# EAGLE board Grove  - XBee Carrier v1.0 (EAGLE 9.4.2)
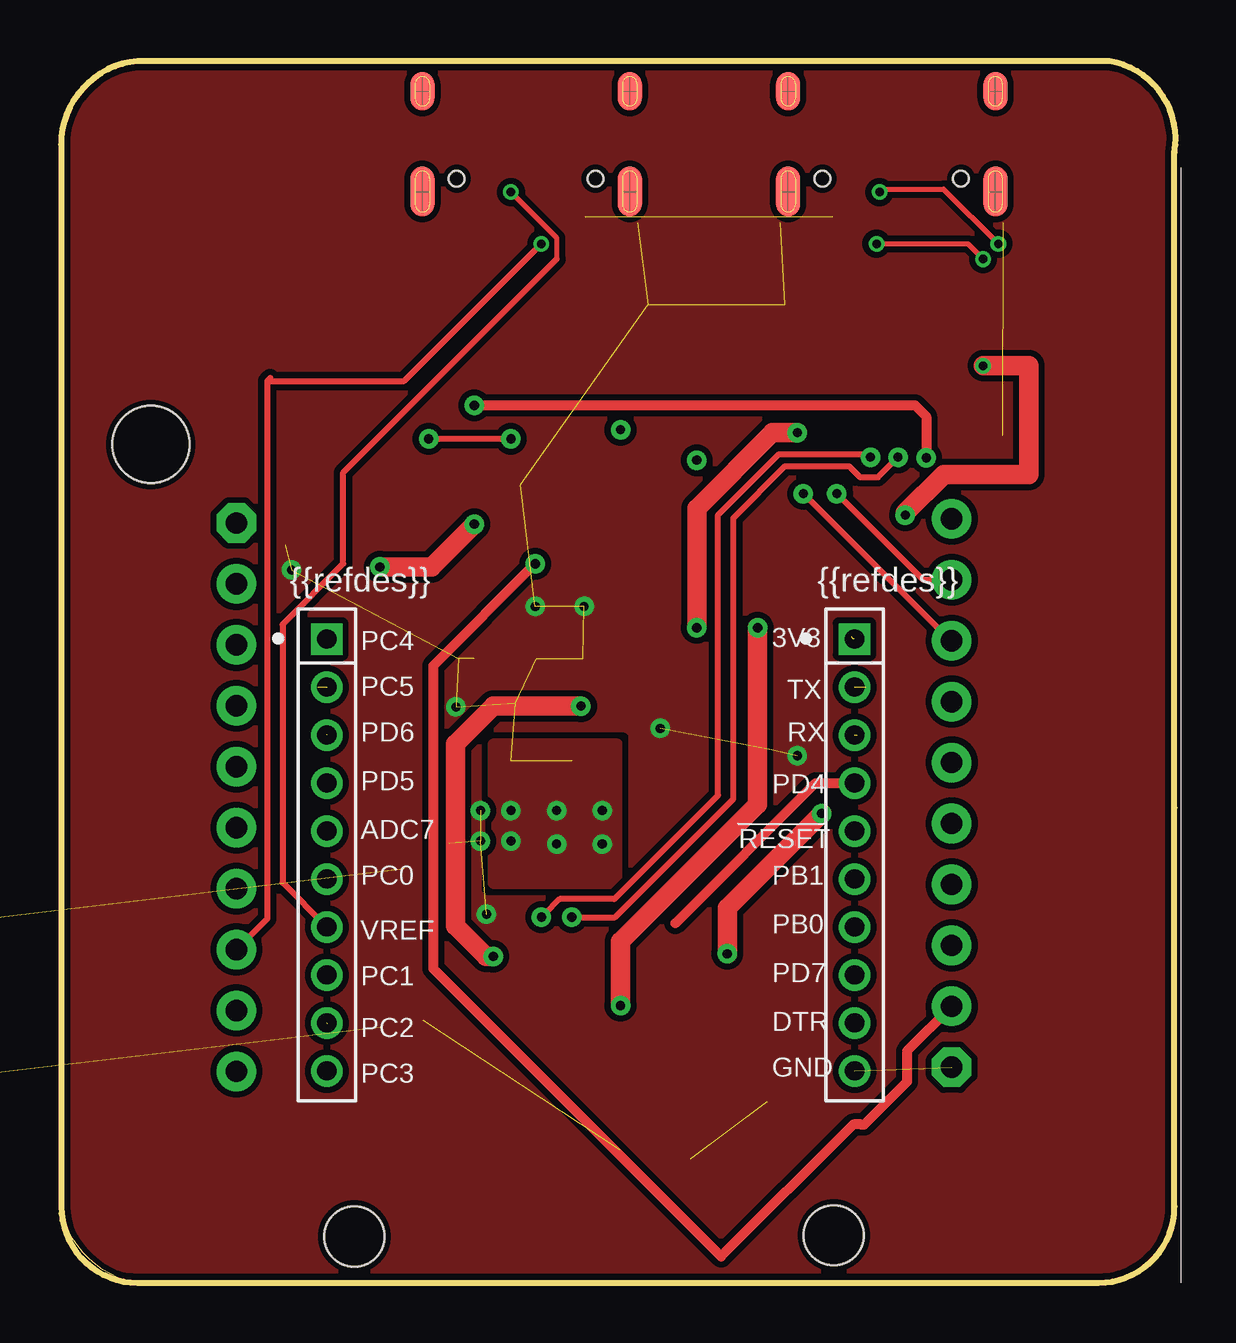
[diagram p0: board, top side]
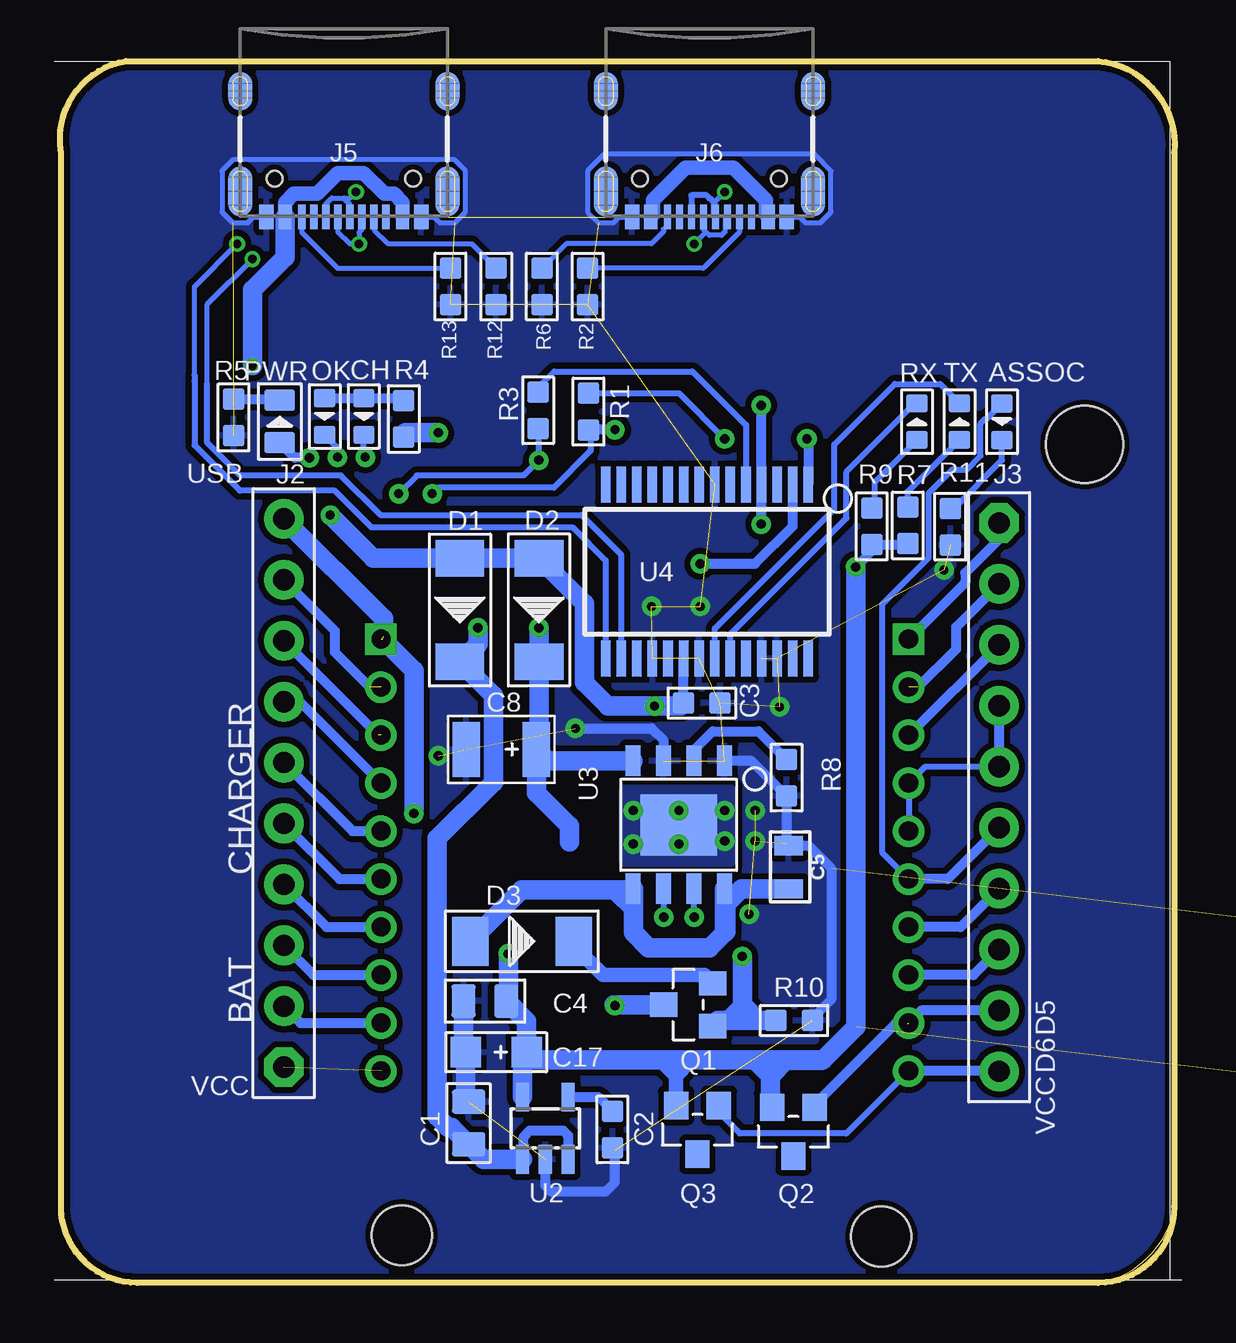
[diagram p1: board, bottom side, seen from below]

Size 46.5 x 50.93 mm. Coordinates in mm from the lower left corner, seen from the top.
Outline: 46.46,19.81 46.46,3.17 arc-90 43.28,0 3.23,0 arc-90 0.06,3.17 0.06,47.12 arc-90 3.23,50.93 43.75,50.93 arc-90 46.46,47.12 46.46,19.81
Outline: 0,47.85 arc-67 2.69,50.93
Outline: 46.48,3.17 arc-67 43.79,0
Outline: 3.1,0 arc-67 0.03,3.17
Outline: 46.46,19.81 46.38,23.27
Copper layers (1*16): Top 0.035mm / dielectric 1.5mm / Bottom 0.035mm
Design rules "SeeedStudio_rule_no_angle_090911 *": minimum track width 6mil, minimum drill 12mil, track to track 6mil, track to pad 6mil, pad to pad 6mil, via to via 6mil, smd to smd 0mil, copper to edge 10mil, drill to drill 10mil, minimum pad ring 10mil, minimum via ring 6mil, stop-mask expansion 2mil, vias tented up to drill 100mil, thermal gap 10mil
Net classes: 0 default: width 0.203 mm, drill 0.305 mm, clearance 0.127 mm
Holes 3.2 mm at 3.79,34.95
Holes 2.5 mm at 32.26,1.98 12.27,1.93

## Footprints (pad centres in the part's own frame; a part is rotated, then mirrored left to right if it is on the bottom)
D0603 = smd 0.762 x 0.889: + -0.762,0; - 0.762,0
0805 = smd 1.016 x 1.397: 1 -0.889,0; 2 0.889,0
0603 = smd 0.889 x 0.889: 1 -0.762,0; 2 0.762,0
0805' = smd 0.8 x 1.2: 1 -0.9,0; 2 0.9,0
AVX-B = smd 1.143 x 2.286: + -1.46,0; - 1.46,0
AVX-A = smd 1.27 x 1.27: + -1.27,0; - 1.27,0
D2010 = smd 1.524 x 2.032: + -2.159,0; - 2.159,0
SULLINS_NPPN101BFCN-RC_0 = drill 0.8 pad 1.3 square: 1 0,9 | drill 0.8 pad 1.3: 2 0,7; 3 0,5; 4 0,3; 5 0,1; 6 0,-1; 7 0,-3; 8 0,-5; 9 0,-7; 10 0,-9
2.54_10P = drill 0.889 pad 1.651 octagon: 1 0,11.43 | drill 0.889 pad 1.651: 2 0,8.89; 3 0,6.35; 4 0,3.81; 5 0,1.27; 6 0,-1.27; 7 0,-3.81; 8 0,-6.35; 9 0,-8.89; 10 0,-11.43
USB-C-16P = smd 0.3 x 1.016: A5 -1.25,0.154; A6 -0.25,0.154; A7 0.25,0.154; A8 1.25,0.154; B5 1.75,0.154; B6 0.75,0.154; B7 -0.75,0.154; B8 -1.75,0.154 | smd 0.6 x 1.016: GND -3.225,0.154; GND2 3.225,0.154 | smd 1 x 2.1: SHLD1 -4.32,-0.915; SHLD2 4.32,-0.915 | smd 1 x 2.1 bottom: SHLD3 -4.32,-0.915; SHLD4 4.32,-0.915 | smd 1 x 1.6: SHLD5 -4.32,-5.095; SHLD8 4.32,-5.095 | smd 1 x 1.6 bottom: SHLD6 -4.32,-5.095; SHLD7 4.32,-5.095 | smd 0.55 x 1.016: VBUS1 -2.45,0.154; VBUS2 2.45,0.154 | hole 0.65: -2.89,-1.445; 2.89,-1.445
D0805 = smd 0.889 x 1.27: + -0.889,0; - 0.889,0
SOT23 = smd 1.016 x 1.143: 1 -0.889,-1.016; 2 0.889,-1.016; 3 0,1.016
QFP80P900X900X145-32N = smd 1.473 x 0.508: 1 -4.216,2.794; 2 -4.216,2.007; 3 -4.216,1.194; 4 -4.216,0.406; 5 -4.216,-0.406; 6 -4.216,-1.194; 7 -4.216,-2.007; 8 -4.216,-2.794; 17 4.216,-2.794; 18 4.216,-2.007; 19 4.216,-1.194; 20 4.216,-0.406; 21 4.216,0.406; 22 4.216,1.194; 23 4.216,2.007; 24 4.216,2.794 | smd 0.508 x 1.473: 9 -2.794,-4.216; 10 -2.007,-4.216; 11 -1.194,-4.216; 12 -0.406,-4.216; 13 0.406,-4.216; 14 1.194,-4.216; 15 2.007,-4.216; 16 2.794,-4.216; 25 2.794,4.216; 26 2.007,4.216; 27 1.194,4.216; 28 0.406,4.216; 29 -0.406,4.216; 30 -1.194,4.216; 31 -2.007,4.216; 32 -2.794,4.216
SOT23-5 = smd 0.55 x 1.2: 1 -0.95,-1.3; 2 0,-1.3; 3 0.95,-1.3; 4 0.95,1.3; 5 -0.95,1.3
SOP8 = smd 0.635 x 1.27: 1 -1.905,-2.667; 2 -0.635,-2.667; 3 0.635,-2.667; 4 1.905,-2.667; 5 1.905,2.667; 6 0.635,2.667; 7 -0.635,2.667; 8 -1.905,2.667 | smd 3.175 x 2.54: HEAT 0,0
SSOP28 = smd 0.4 x 1.5: 1 -4.225,-3.625; 2 -3.575,-3.625; 3 -2.925,-3.625; 4 -2.275,-3.625; 5 -1.625,-3.625; 6 -0.975,-3.625; 7 -0.325,-3.625; 8 0.325,-3.625; 9 0.975,-3.625; 10 1.625,-3.625; 11 2.275,-3.625; 12 2.925,-3.625; 13 3.575,-3.625; 14 4.225,-3.625; 15 4.225,3.625; 16 3.575,3.625; 17 2.925,3.625; 18 2.275,3.625; 19 1.625,3.625; 20 0.975,3.625; 21 0.325,3.625; 22 -0.325,3.625; 23 -0.975,3.625; 24 -1.625,3.625; 25 -2.275,3.625; 26 -2.925,3.625; 27 -3.575,3.625; 28 -4.225,3.625

## Placement (x,y rotation side)
ASSOC  Green  [D0603]  7.24,35.89 270 bottom
C1  10uF  [0805]  29.47,6.66 90 bottom
C2  100nF  [0603]  23.47,6.39 270 bottom
C3  100nF  [0603]  19.75,24.16 180 bottom
C4  10uF  [0805]  28.79,11.75 180 bottom
C5  1.0uF  [0805']  16.13,17.32 270 bottom
C8  10V-22uF  [AVX-B]  28.11,22.24 180 bottom
C17  15v-10uF  [AVX-A]  28.32,9.61 180 bottom
CH  RED  [D0603]  33.84,36.11 270 bottom
D1  SS14  [D2010]  29.83,28.04 270 bottom
D2  SS14  [D2010]  26.54,28.05 270 bottom
D3  SS14  [D2010]  27.25,14.23 0 bottom
J1  SULLINS_NPPN101BFCN-RCSULLINS_NPPN101BFCN-RC_0_0  [SULLINS_NPPN101BFCN-RC_0]  11.13,17.83 0 top
J2  HEADER-10P_STANDARD  [2.54_10P]  37.17,20.42 180 bottom
J3  HEADER-10P_STANDARD  [2.54_10P]  7.36,20.24 0 bottom
J4  SULLINS_NPPN101BFCN-RCSULLINS_NPPN101BFCN-RC_0_0  [SULLINS_NPPN101BFCN-RC_0]  33.12,17.83 0 top
J5  [USB-C-16P]  34.67,44.58 180 bottom
J6  [USB-C-16P]  19.43,44.58 180 bottom
OK  Green  [D0603]  35.47,36.11 270 bottom
PWR  red  [D0805]  37.34,35.9 90 bottom
Q1  Si2305DS  [SOT23]  20.32,11.59 90 bottom
Q2  Si2305DS  [SOT23]  15.93,6.3 180 bottom
Q3  Si2305DS  [SOT23]  19.93,6.38 180 bottom
R1  1K  [0603]  24.48,36.32 270 bottom
R2  [0603]  24.51,41.53 90 bottom
R3  1K  [0603]  26.57,36.37 270 bottom
R4  1k  [0603]  32.18,36.01 270 bottom
R5  1K  [0603]  39.27,36.08 90 bottom
R6  [0603]  26.42,41.53 90 bottom
R7  1K  [0603]  11.16,31.57 270 bottom
R8  3.9K  [0603]  16.22,21.06 90 bottom
R9  1K  [0603]  12.66,31.53 270 bottom
R10  10K  [0603]  15.91,10.94 180 bottom
R11  1K  [0603]  9.39,31.52 90 bottom
R12  [0603]  28.32,41.53 90 bottom
R13  [0603]  30.23,41.53 90 bottom
RX  red  [D0603]  10.78,35.89 90 bottom
TX  red  [D0603]  9.01,35.9 90 bottom
U1  TUSB2046BVF  [QFP80P900X900X145-32N]  -9.14,10.29 0 top  (outside the outline)
U2  RT9167A_33PB  [SOT23-5]  26.27,6.44 0 bottom
U3  CN3083  [SOP8]  20.71,19.09 180 bottom
U4  FT232RL  [SSOP28]  19.53,29.64 180 bottom

## Library data of the parts
ASSOC C1-C4 C8 C17 CH D1-D3 OK PWR Q1-Q3 R1-R13 RX TX = discrete
C5 = SparkFun-Capacitors; PROD_ID: CAP-08064
J1 J4 = Sullins - NPPN101BFCN-RC; CENTROID_NOT_SPECIFIED: No; CONNECTOR_TYPE: Female; DATASHEET: http://www.sullinscorp.com/drawings/75_1BFC_10483.pdf; DIGIKEY_DESCRIPTION: CONN RECEPT 2MM SINGLE STR 10POS; DIGIKEY_PART_NUMBER: S5751-10-ND; IS_FEMALE: yes; LEAD_FREE: yes; MF: Sullins; MPN: NPPN101BFCN-RC; NUMBER_OF_PINS: 10; NUM_PINS: 10; PACKAGE: CONN_PTH_RCT10; PIN_PITCH: 2 mm; PREFIX: J; ROHS: yes; ROWS: 1; TEMPERATURE_RANGE_HIGH: +105°C; TEMPERATURE_RANGE_LOW: -40°C
J2 J3 = Connector
J5 J6 = SparkFun-Connectors; PROD_ID: CONN-14122
U1 = TUSB2046BVF; AVAILABILITY: Unavailable; DESCRIPTION: 4-Port Full-Speed Universal Serial Bus Hub 32-LQFP 0 to 70; MF: Texas Instruments; MP: TUSB2046BVF; PACKAGE: LQFP-32 Texas Instruments; PRICE: None
U2-U4 = IC

## Nets
ASSOC: ASSOC.+ J1.6 J3.6
D4: J2.7 J4.4
D5: J1.4 J1.5 J3.4 J3.5
D6: J1.3 J3.3
D7: J2.3 J4.8
D8: J2.4 J4.7
D9: J2.5 J4.6
D+: J5.A6 J5.B6 U4.15
D-: J5.A7 J5.B7 U4.16
D_2+: J1.7 J3.7 J6.A6 J6.B6
D_2-: J1.8 J3.8 J6.A7 J6.B7
DTR: J2.2 J4.9 U4.2
GND: C1.2 C2.2 C3.1 C4.2 C5.1 C8.- C17.- J5.GND J5.GND2 J6.GND J6.GND2 R2.1 R5.1 R6.1 R8.1 R10.1 R11.1 R12.1 R13.1 U1.7 U1.28 U1.31 U2.2 U3.1 U3.3 U4.7 U4.18 U4.21 U4.25 U4.26
HEAT: U3.HEAT
N$1: PWR.- R5.2
N$2: R8.2 U3.2
N$4: J6.A5 R2.2
N$5: J5.A5 R12.2
N$6: C2.1 U2.4
N$7: CH.- U3.7
N$8: OK.- U3.6
N$9: CH.+ OK.+ R4.1
N$11: D3.- Q1.2
N$12: ASSOC.- R11.2
N$13: J6.B5 R6.2
N$14: J5.B5 R13.2
N$15: R9.1 RX.+
N$16: R7.1 TX.+
N$17: J2.1 J4.10
PWR_CTR1: J1.10 J3.10 Q3.1
PWR_CTR2: J1.9 J3.9 Q2.1
RESET: J2.6 J4.5
RX: J2.8 J4.3 R1.2
RX_LED: RX.- U4.23
RXD: R3.1 U4.5
SCL: J1.2 J3.2
SDA: J1.1 J3.1
TX: J2.9 J4.2 R3.2
TX_LED: TX.- U4.22
TXD: R1.1 U4.1
USB_5V: C3.2 D1.+ D2.+ J5.VBUS1 J5.VBUS2 J6.VBUS1 J6.VBUS2 Q1.1 R10.2 U4.20
VBET: C5.2 D3.+ U3.5 U3.8
VBET_OUT: C1.1 D1.- Q1.3 U2.1 U2.3
VCC: U1.3
VCC_2: U1.25
VCC_3V3: C4.1 C17.+ J2.10 J4.1 PWR.+ Q2.2 Q3.2 R7.2 R9.2 U1.8 U2.5 U4.4
VCC_OUT1: Q3.3
VCC_OUT2: Q2.3
VIN: C8.+ D2.- R4.2 U3.4

## Tracks (layer width: path | path; a pad name or v marks a point on that pad's centre or on a via)
ASSOC
  Bottom 0.254: ASSOC.+ 7.87,36.02 7.92,36.02 8.13,35.81 8.13,34.48 8.7,33.91 9.29,33.91 10.29,32.92 10.29,30.23 12.24,28.28 12.24,17.94 J1.6 | 9.48,16.85 9.5,16.83
  Bottom 0.406: 9.5,16.83 9.48,16.85 J3.6 | 9.5,16.83 J1.6
D4
  Top 0.254: 31.5,20.83
  Top 0.406: 25.65,14.99 31.5,20.83 | 31.5,20.83 J4.4
  Bottom 0.406: J4.4 36.52,24.23 J2.7
D5
  Bottom 0.254: 10.98,20.97 J1.4 | J3.5 10.44,21.51 J1.4 | J1.4 J1.5
  Bottom 0.406: J3.5 J3.4
D6  (1 unrouted)
  Bottom 0.406: J3.3 J1.3
D7
  Bottom 0.254: J4.8
  Bottom 0.406: J2.3 35.93,12.83 J4.8
D8
  Bottom 0.406: J2.4 35.39,14.83 J4.7
D9
  Bottom 0.406: J2.5 34.85,16.83 J4.6
D+  (via drill 0.35)
  Top 0.203: v39.12,43.31 36.83,45.59 34.29,45.59 v34.16,45.47
  Bottom 0.203: J5.A6 34.42,44.96 34.67,45.21 | J5.B6 35.42,44.97 35.18,45.21 34.67,45.21 | 40.89,37.59 40.89,41.53 v39.12,43.31 | 34.67,45.21 34.42,45.21 v34.16,45.47
  Bottom 0.254: U4.15 23.76,30.11 25.15,31.5 33.53,31.5 35.05,33.02 39,33.02 40.89,34.91 40.89,37.59 40.89,37.85
D-  (via drill 0.35)
  Top 0.203: v34.04,43.31 37.85,43.31 v38.48,42.67
  Bottom 0.203: J5.A7 34.92,43.81 34.42,43.31 v34.04,43.31 34.04,43.79 33.92,43.91 J5.B7 | v38.48,42.67 40.39,40.77 40.39,37.46
  Bottom 0.254: U4.16 23.11,30.35 24.77,32 33.15,32 34.8,33.66 38.99,33.66 40.39,35.05 40.39,37.46
D_2+  (via drill 0.35)
  Top 0.203: v18.8,45.47 20.7,43.56 20.7,42.67
  Top 0.254: J1.7 9.27,16.68 9.27,27.43 11.81,29.97 11.81,33.78 20.7,42.67
  Bottom 0.203: J6.A6 19.18,45.08 v18.8,45.47
  Bottom 0.254: J1.7 | J6.B6 20.18,45.33 19.55,45.33 19.43,45.21 19.41,45.21 19.25,45.05 19.25,44.49 J6.A6
  Bottom 0.406: J3.7 8.96,14.83 J1.7
D_2-  (via drill 0.35)
  Top 0.254: 8.76,37.72 8.64,37.59 | J3.8 8.64,15.17 8.64,37.59 | 8.64,37.59 14.35,37.59 v20.07,43.31
  Bottom 0.203: J6.B7 18.78,44.33 18.78,43.81 18.93,43.66 19.44,43.66 19.57,43.8 | 19.57,43.8 19.68,43.91 J6.A7 | 19.57,43.8 v20.07,43.31
  Bottom 0.406: J3.8 8.42,12.83 J1.8
DTR  (via drill 0.38 pad 0.81)
  Top 0.254: 33.53,6.6 33.4,6.6
  Top 0.406: v19.81,29.97 15.57,25.73 15.57,13.09 27.56,1.1 33.06,6.6 33.4,6.6 | J2.2 35.31,9.66 35.31,8.38 33.53,6.6
  Bottom 0.254: J4.9
  Bottom 0.406: J2.2 36.47,10.83 J4.9 | v19.81,29.97 17.53,29.97 15.96,31.54 U4.2
GND  (via drill 0.38 pad 0.81)  (29 unrouted)
  Bottom 0.203: J5.GND 30.9,44.42 30.66,44.19 30.04,44.19 29.6,44.63 29.6,46.35 30.05,46.81 39.29,46.81 39.74,46.35 39.74,44.63 39.3,44.19 38.68,44.19 38.44,44.42 J5.GND2 | J6.GND 15.66,44.42 15.42,44.19 14.8,44.19 14.36,44.63 14.36,46.35 15.04,47.04 23.82,47.04 24.5,46.35 24.5,44.63 24.06,44.19 23.44,44.19 23.2,44.42 J6.GND2
  Bottom 0.406: U2.2 26.27,4.04 26.04,3.81 23.75,3.81 23.37,4.19 23.37,5.53 C2.2 | R10.1 15.14,11.02 14.35,11.81 14.35,17.27 15.3,18.22 C5.1 16.22,18.31 R8.1 17.68,21.76 U3.1 | U3.3 21.35,22.62 21.84,23.11 v25.02,23.11
  Bottom 0.813: C4.2 29.68,9.7 C17.- 29.59,7.67 C1.2
  other vias: 30.73,21.97 16.51,24 19.81,28.19 17.78,15.37 21.84,28.19 17.53,18.41 17.53,19.68 9.65,29.72
  pour Bottom (isolate 0.254, rank 2): 46.74,51.05 -0.13,51.05 -0.13,0 46.74,0
  pour Top (isolate 0.254, rank 2): 46.74,51.05 -0.13,51.05 -0.13,0 46.74,0
HEAT  (via drill 0.38 pad 0.81)
  other vias: 22.61,19.68 22.61,18.29 20.7,19.68 18.8,19.68 18.8,18.41 20.7,18.29
  pour Bottom (isolate 0.254, no thermals): 22.99,20.57 18.54,20.57 18.54,17.53 22.99,17.53
  pour Top (isolate 0.254): 23.24,22.48 18.03,22.48 18.03,16.64 23.24,16.64
N$1
  Bottom 0.406: R5.2 37.39,36.84 PWR.-
N$2
  Bottom 0.406: U3.2 20.08,22.21 19.3,22.99 17.38,22.99 R8.2
N$4
  Bottom 0.203: 18.16,44.4 J6.A5 18.18,43.8 19.69,42.29 R2.2
N$5
  Bottom 0.203: J5.A5 33.4,44.4 33.4,43.89 32.82,43.31 29.34,43.31 R12.2
N$6
  Bottom 0.406: U2.4 24.06,7.74 C2.1
N$7  (via drill 0.38 pad 0.81)
  Top 0.254: v20.07,15.24 20.07,15.37 20.19,15.37 20.83,16 23.11,16 27.43,20.32 27.43,32 29.97,34.54 33.65,34.54 v33.78,34.42
  Bottom 0.254: U3.7 20.08,15.25 v20.07,15.24 | CH.- 33.84,34.47 v33.78,34.42
N$8  (via drill 0.38 pad 0.81)
  Top 0.254: v21.34,15.24 23.14,15.24 28.07,20.17 28.07,31.88 30.23,34.04 32.89,34.04 33.35,33.58 34.09,33.58 v34.93,34.42
  Bottom 0.254: U3.6 21.35,15.25 v21.34,15.24 | OK.- 35.47,35.33 34.94,34.8 v34.94,34.42 v34.93,34.42
N$9
  Bottom 0.406: OK.+ CH.+ 32.28,36.88 R4.1
N$11
  Bottom 0.61: D3.- 25.09,14.04 23.88,12.83 19.64,12.83 Q1.2
N$12
  Bottom 0.254: R11.2 9.25,32.28 7.24,34.29 ASSOC.-
N$13
  Bottom 0.203: J6.B5 21.18,44.1 21.35,43.93 21.35,43.81 21.86,43.31 25.4,43.31 R6.2
N$14
  Bottom 0.203: J5.B5 36.42,43.79 34.92,42.29 R13.2
N$15
  Bottom 0.254: RX.+ 12.53,33.38 12.53,32.42 R9.1
N$16
  Bottom 0.254: R7.1 11.16,32.98 TX.+
N$17  (1 unrouted)
PWR_CTR1
  Bottom 0.254: Q3.1 19.04,7.1 18.16,6.22 13.73,6.22 13.73,6.23 J1.10
  Bottom 0.406: 7.37,8.83 J3.10 7.37,8.83 J1.10
PWR_CTR2  (1 unrouted)
  Bottom 0.406: Q2.1 15.04,7.44 11.68,10.79 11.16,10.79 10.6,11.35 J3.9
RESET
  Bottom 0.406: J2.6 34.31,18.83 J4.5
RX  (via drill 0.38 pad 0.81)  (1 unrouted)
  Top 0.254: J2.8 37.11,26.77 v30.99,32.89
  Bottom 0.254: v30.99,32.89 30.73,33.15 25.92,33.15 24.38,34.68 24.38,35.46 R1.2
  Bottom 0.406: J2.8 33.23,22.83 | v23.37,35.56 R1.2
RX_LED
  Bottom 0.254: RX.- 10.83,36.7 13.72,33.81 13.72,31.88 18.56,27.04 U4.23
RXD
  Bottom 0.254: R3.1 26.57,37.31 25.89,37.99 20.14,37.99 17.91,35.75 U4.5
SCL  (1 unrouted)
  Bottom 0.406: 10.73,24.83 9.14,26.42 9.14,27.34 J3.2
SDA
  Bottom 0.254: J1.1
  Bottom 0.406: J3.1 7.36,31 8.76,29.59 8.76,29.19 J1.1
TX  (via drill 0.38 pad 0.81)  (1 unrouted)
  Top 0.254: J2.9 35.97,29.31 v32.38,32.89
  Bottom 0.254: v32.38,32.89 31.62,33.66 27.18,33.66 v26.54,34.29 26.54,35.59 R3.2
  Bottom 0.406: 33.59,24.83 35.05,26.29 35.05,27.19 J2.9
TX_LED
  Bottom 0.254: TX.- 9.81,37.46 11.71,37.46 14.22,34.95 14.22,32.26 19.21,27.27 U4.22
TXD  (via drill 0.38 pad 0.81)
  Top 0.254: v18.8,35.18 v15.37,35.18
  Bottom 0.254: R1.1 20.7,37.08 v18.8,35.18
  Bottom 0.406: U4.1 15.31,35.12 v15.37,35.18
USB_5V  (via drill 0.35, 0.38 pad 0.81)  (1 unrouted)
  Top 0.813: v18.06,13.6 17.77,13.6 16.5,14.87 16.5,22.47 18.07,24.04 v21.72,24.04 | v35.24,32 35.24,32.1 36.84,33.7 40.39,33.7 40.39,38.23 v38.48,38.23
  Bottom 0.406: U4.20 C3.2
  Bottom 0.61: J5.VBUS2 37.12,45.03 36.76,45.39 35.79,45.39 34.93,46.25 33.84,46.25 32.98,45.39 32.58,45.39 32.22,45.03 J5.VBUS1 | J6.VBUS1 17.07,44.52 17.07,45.12 18.44,46.48 20.43,46.48 21.79,45.12 21.79,44.52 J6.VBUS2
  Bottom 0.813: 18.03,10.94 19.07,10.94 Q1.1 | 18.03,10.94 R10.2 | 18.03,10.94 18.06,10.97 18.06,11.53 | v18.06,13.6 18.06,11.53 | 18.06,11.53 18.54,11.05 17.53,11.05 17.91,11.43 | C3.2 20.63,24.04 v21.72,24.04 23.66,24.04 24.64,25.02 24.64,28.3 D2.+ D1.+ 33.44,30.2 v35.24,32 | J5.VBUS2 37.12,42.76 38.48,41.4 v38.48,38.23
VBET
  Bottom 0.813: 18.81,14.59 U3.8 | 18.81,14.59 19.43,13.97 21.97,13.97 22.61,14.6 22.61,15.62 | 22.61,15.62 22.61,16.41 U3.5 22.66,16.38 23.24,16.38 | 29.65,14.48 D3.+ 27.26,16.38 23.24,16.38 | 23.24,16.38 23.24,16.26 22.61,15.62 | 18.81,14.59 18.75,14.66 18.75,15.77 18.09,16.42 C5.2
VBET_OUT  (via drill 0.38 pad 0.81)
  Top 0.813: v23.37,11.56 23.37,14.22 29.08,19.94 v29.08,27.3
  Bottom 0.406: U2.3 25.32,6.14 25.53,6.35 26.92,6.35 27.18,6.1 27.18,5.19 U2.1
  Bottom 0.813: U2.1 28.84,5.14 C1.1 | 29.34,5.64 C1.1 | Q1.3 23.41,11.59 v23.37,11.56 | D1.- 29.85,25.9 | v29.08,27.3 29.08,26.64 D1.- | C1.1 30.18,6.48 30.32,6.48 30.78,6.94 30.78,18.52 28.44,20.86 28.44,24.49 D1.-
VCC_3V3  (via drill 0.38 pad 0.81)  (3 unrouted)
  Top 0.406: v36.11,34.39 36.11,36.11 35.64,36.58 v17.27,36.58
  Top 0.813: v31.75,19.56 27.81,15.62 v27.81,13.72 | v13.34,29.84 15.49,29.84 v17.27,31.62
  Bottom 0.406: v13.34,29.84 12.53,30.65 R9.2 11.21,30.77 | 11.21,30.77 11.18,30.73 | 11.2,30.77 11.07,30.77 | 11.21,30.77 11.2,30.77 | 11.2,30.77 R7.2 | v17.27,31.62 17.26,31.64 U4.4 17.26,36.56 v17.27,36.58 | v36.11,34.39 36.72,34.39 PWR.+
  Bottom 0.61: 20.82,8.74 20.82,9.16 20.96,9.29 | 20.82,8.74 Q3.2 | 20.82,8.74 20.93,8.74 21.34,9.14 | 20.82,8.74 20.73,8.74 20.32,9.14
  Bottom 0.813: 27.22,9.29 U2.5 | 27.22,9.29 27.22,9.44 C17.+ 27.05,10.9 C4.1 27.81,11.83 v27.81,13.72 | 27.22,9.29 20.96,9.29 16.89,9.29 | Q2.2 16.89,7.39 16.89,8.64 | 14.71,9.29 14.73,9.27 16.26,9.27 16.89,8.64 | v13.34,29.84 13.34,10.67 14.71,9.29 | 33.05,26.83 31.75,25.53 v31.75,19.56 | 16.89,9.29 14.71,9.29 | 16.89,8.64 16.89,9.29 | 16.89,8.64 17.53,9.27 | J2.10 33.02,27.69 33.02,26.93
VCC_OUT1
  Bottom 0.813: 19.94,5.35 Q3.3
VIN  (via drill 0.38 pad 0.81)
  Top 0.813: v26.54,27.3 26.54,32.28 29.7,35.43 v30.73,35.43
  Bottom 0.813: 25.27,18.38 25.27,19.05 26.65,20.43 C8.+ | D2.- v26.54,27.3 | D2.- | D2.- 26.54,22.34 C8.+ | U3.4 26.17,21.76 C8.+ | v30.73,35.43 32.11,35.43 32.18,35.36 R4.2

## Text on the board
tPlace: PC4 | 3V3 | PC5 | TX | PD6 | RX | PD5 | PD4 | ADC7 | RESET | PC0 | PB1 | PB0 | VREF | PC1 | PD7 | DTR | PC2 | GND | PC3
bPlace: USB | CHARGER | BAT | D5 | D6 | VCC | VCC